# EAGLE board HX4002 CE021 MAX40200 Panel (EAGLE 9.6.2)
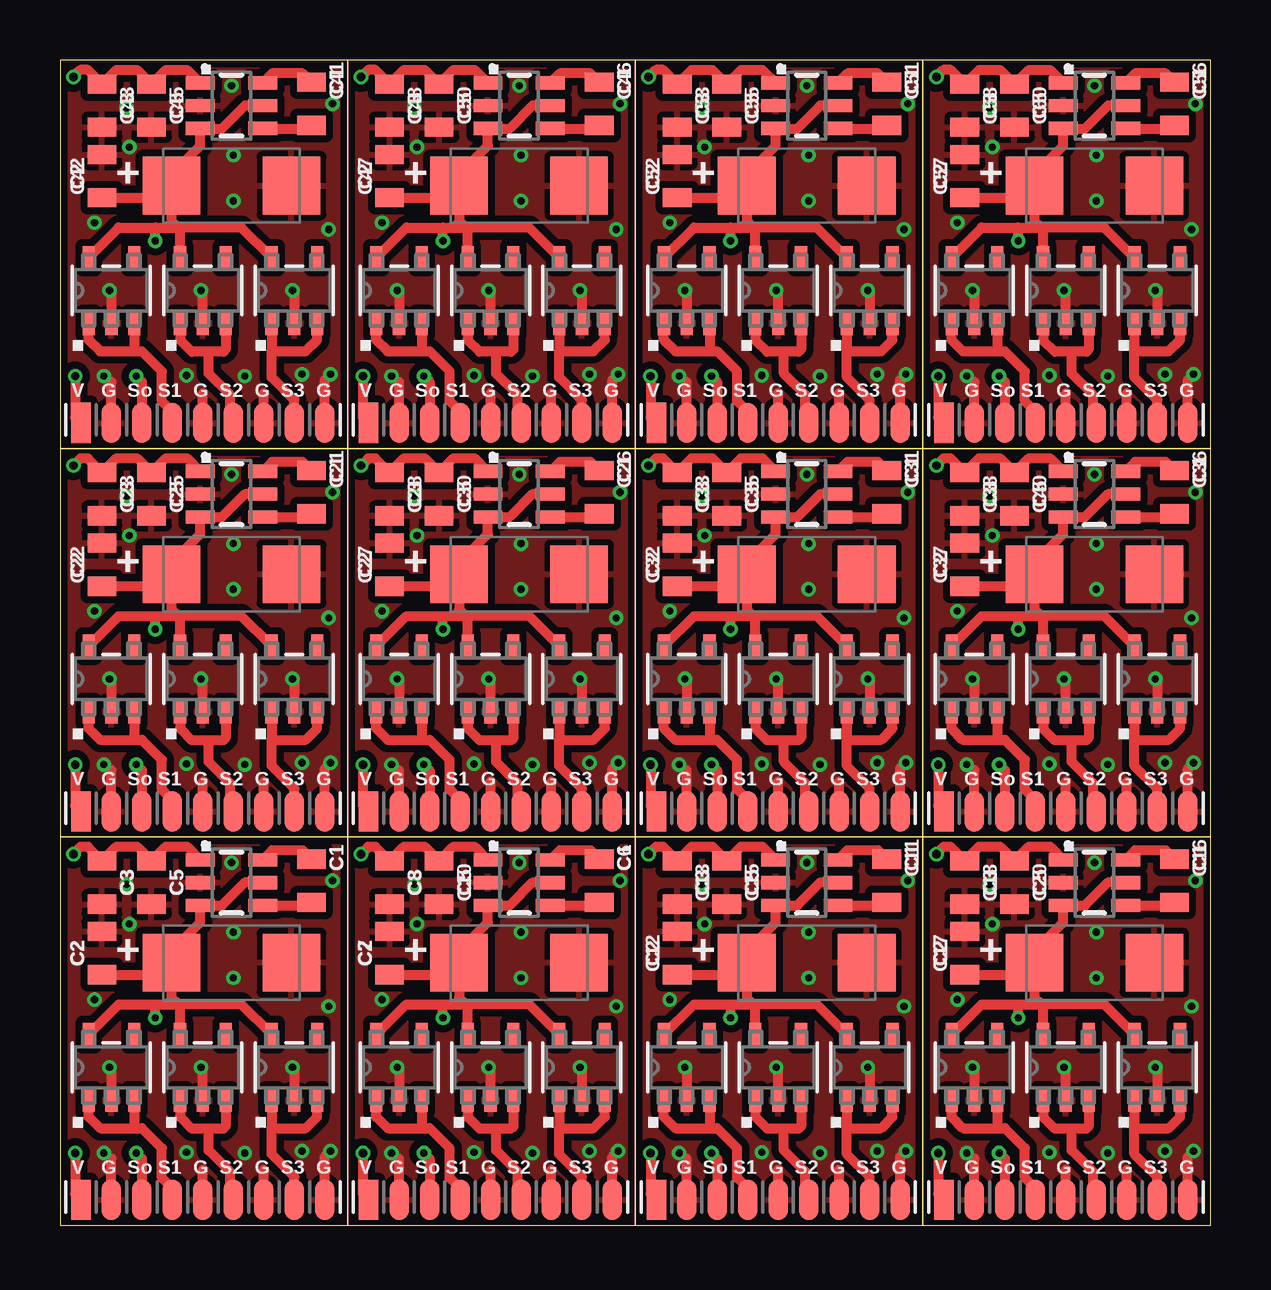
[diagram p0: board, top side]
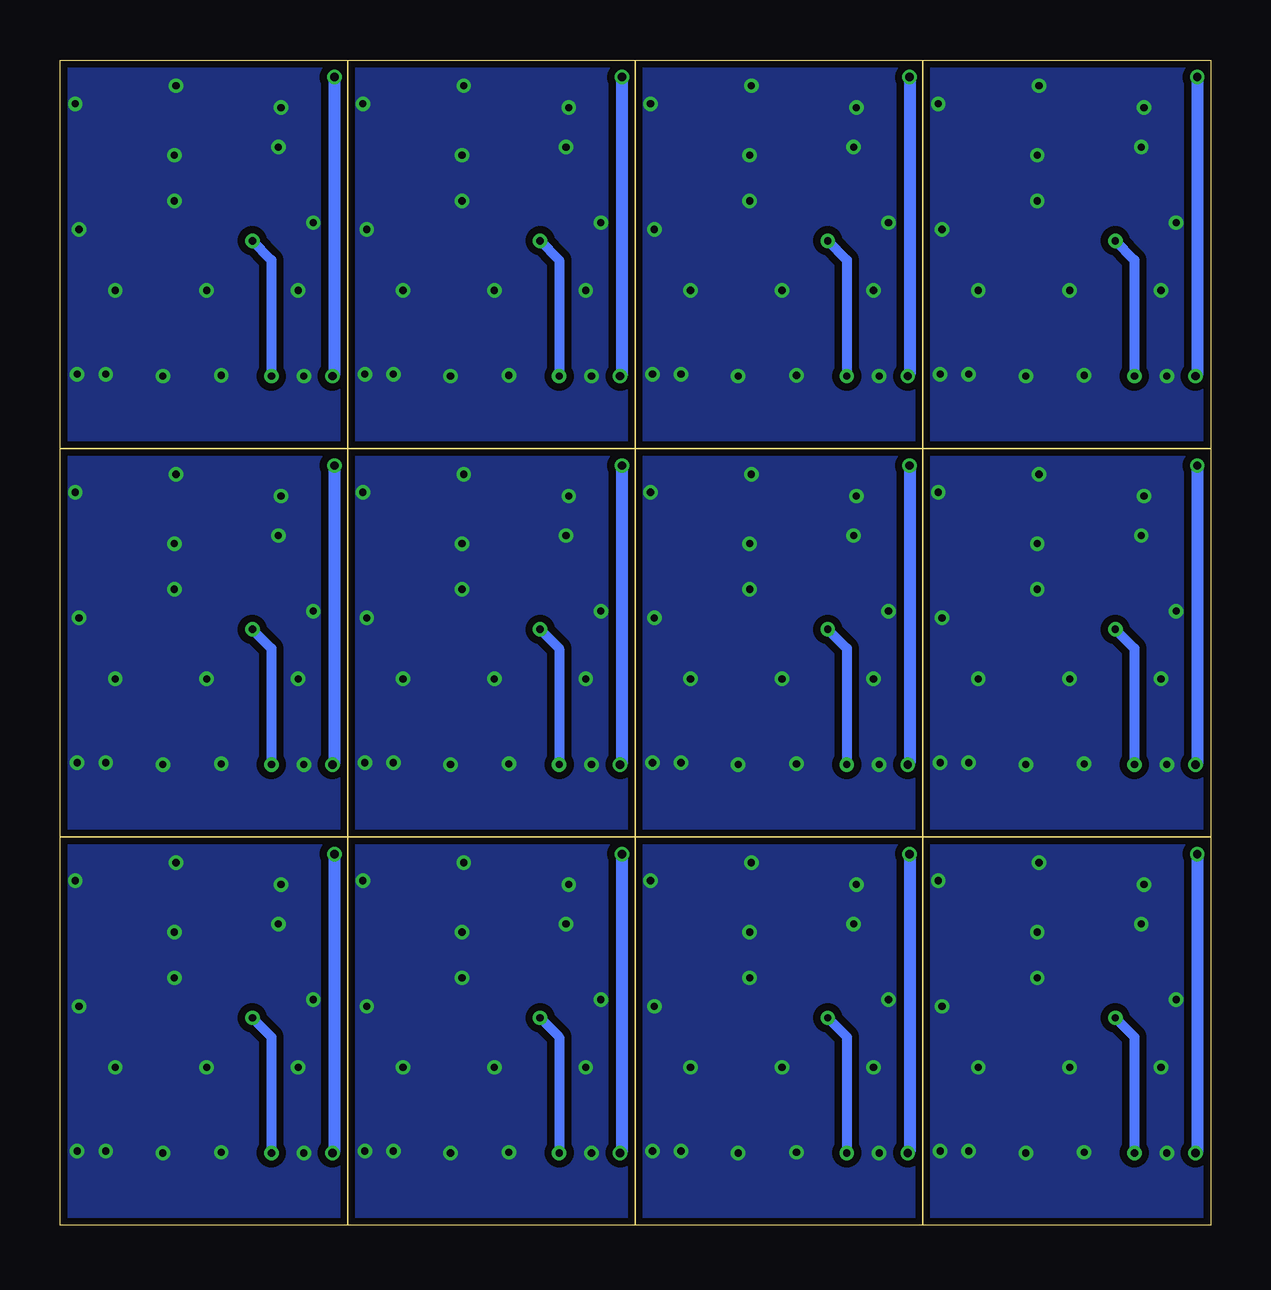
[diagram p1: board, bottom side, seen from below]

Size 47.94 x 48.58 mm. Coordinates in mm from the lower left corner, seen from the top.
Outline: 11.99,0 0,0 0,16.19
Outline: 11.99,0 11.99,16.19
Outline: 11.99,16.19 0,16.19
Outline: 11.99,0 23.97,0
Outline: 23.97,0 23.97,16.19
Outline: 23.97,16.19 11.99,16.19
Outline: 11.99,16.19 11.99,0
Outline: 23.97,0 35.96,0
Outline: 35.96,0 35.96,16.19
Outline: 35.96,16.19 23.97,16.19
Outline: 23.97,16.19 23.97,0
Outline: 35.96,0 47.94,0 47.94,16.19
Outline: 47.94,16.19 35.96,16.19
Outline: 35.96,16.19 35.96,0
Outline: 0,16.19 11.99,16.19
Outline: 11.99,16.19 11.99,32.38
Outline: 11.99,32.38 0,32.38
Outline: 0,32.38 0,16.19
Outline: 11.99,16.19 23.97,16.19
Outline: 23.97,16.19 23.97,32.38
Outline: 23.97,32.38 11.99,32.38
Outline: 11.99,32.38 11.99,16.19
Outline: 23.97,16.19 35.96,16.19
Outline: 35.96,16.19 35.96,32.38
Outline: 35.96,32.38 23.97,32.38
Outline: 23.97,32.38 23.97,16.19
Outline: 35.96,16.19 47.94,16.19
Outline: 47.94,16.19 47.94,32.38
Outline: 47.94,32.38 35.96,32.38
Outline: 35.96,32.38 35.96,16.19
Outline: 0,32.38 11.99,32.38
Outline: 11.99,32.38 11.99,48.58
Outline: 11.99,48.58 0,48.58 0,32.38
Outline: 11.99,32.38 23.97,32.38
Outline: 23.97,32.38 23.97,48.58
Outline: 23.97,48.58 11.99,48.58
Outline: 11.99,48.58 11.99,32.38
Outline: 23.97,32.38 35.96,32.38
Outline: 35.96,32.38 35.96,48.58
Outline: 35.96,48.58 23.97,48.58
Outline: 23.97,48.58 23.97,32.38
Outline: 35.96,32.38 47.94,32.38
Outline: 47.94,32.38 47.94,48.58 35.96,48.58
Outline: 35.96,48.58 35.96,32.38
Copper layers (1*16): Top 0.035559375mm / dielectric 1.6mm / Bottom 0.035559375mm
Design rules "Arxterra-HLCpcb-2-layer-KW": minimum track width 6mil, minimum drill 0.3mm, track to track 6mil, track to pad 6mil, pad to pad 6mil, via to via 10mil, smd to smd 6mil, copper to edge 8mil, drill to drill 6mil, minimum pad ring 5mil, minimum via ring 3mil, stop-mask expansion 2.5mil, vias tented up to drill 25mil, thermal gap 10mil

## Footprints (pad centres in the part's own frame; a part is rotated, then mirrored left to right if it is on the bottom)
0805 = smd 0.8 x 1.2: 1 -0.9,0; 2 0.9,0
SMC_C = smd 2.4 x 2.4: + -2.5,0; - 2.5,0
SOT23-6 = smd 0.55 x 1.2: 1 0.95,1.3; 2 0,1.3; 3 -0.95,1.3; 4 -0.95,-1.3; 5 0,-1.3; 6 0.95,-1.3
21-0057F_MXM = smd 0.978 x 0.508: 1 -1.365,0.95; 2 -1.365,0; 3 -1.365,-0.95; 4 1.365,-0.95; 5 1.365,0.95
M_1R09_50MIL-V = smd 0.813 x 1.676: P$1 -5.08,-0.127; P$2 -3.81,-0.127; P$3 -2.54,-0.127; P$4 -1.27,-0.127; P$5 0,-0.127; P$6 1.27,-0.127; P$7 2.54,-0.127; P$8 3.81,-0.127; P$9 5.08,-0.127

## Placement (x,y rotation side)
C1  4.7uF  [0805]  10.48,14.37 90 top
C2  10uF  [0805]  1.75,11.35 90 top
C3  10uF  [0805]  1.75,14.29 270 top
C4  330uF  [SMC_C]  7.14,10.95 0 top
C5  10uF  [0805]  3.81,14.29 270 top
C6  4.7uF  [0805]  22.46,14.37 90 top
C7  10uF  [0805]  13.73,11.35 90 top
C8  10uF  [0805]  13.73,14.29 270 top
C9  330uF  [SMC_C]  19.13,10.95 0 top
C10  10uF  [0805]  15.8,14.29 270 top
C11  4.7uF  [0805]  34.45,14.37 90 top
C12  10uF  [0805]  25.72,11.35 90 top
C13  10uF  [0805]  25.72,14.29 270 top
C14  330uF  [SMC_C]  31.11,10.95 0 top
C15  10uF  [0805]  27.78,14.29 270 top
C16  4.7uF  [0805]  46.43,14.37 90 top
C17  10uF  [0805]  37.7,11.35 90 top
C18  10uF  [0805]  37.7,14.29 270 top
C19  330uF  [SMC_C]  43.1,10.95 0 top
C20  10uF  [0805]  39.77,14.29 270 top
C21  4.7uF  [0805]  10.48,30.56 90 top
C22  10uF  [0805]  1.75,27.54 90 top
C23  10uF  [0805]  1.75,30.48 270 top
C24  330uF  [SMC_C]  7.14,27.15 0 top
C25  10uF  [0805]  3.81,30.48 270 top
C26  4.7uF  [0805]  22.46,30.56 90 top
C27  10uF  [0805]  13.73,27.54 90 top
C28  10uF  [0805]  13.73,30.48 270 top
C29  330uF  [SMC_C]  19.13,27.15 0 top
C30  10uF  [0805]  15.8,30.48 270 top
C31  4.7uF  [0805]  34.45,30.56 90 top
C32  10uF  [0805]  25.72,27.54 90 top
C33  10uF  [0805]  25.72,30.48 270 top
C34  330uF  [SMC_C]  31.11,27.15 0 top
C35  10uF  [0805]  27.78,30.48 270 top
C36  4.7uF  [0805]  46.43,30.56 90 top
C37  10uF  [0805]  37.7,27.54 90 top
C38  10uF  [0805]  37.7,30.48 270 top
C39  330uF  [SMC_C]  43.1,27.15 0 top
C40  10uF  [0805]  39.77,30.48 270 top
C41  4.7uF  [0805]  10.48,46.75 90 top
C42  10uF  [0805]  1.75,43.74 90 top
C43  10uF  [0805]  1.75,46.67 270 top
C44  330uF  [SMC_C]  7.14,43.34 0 top
C45  10uF  [0805]  3.81,46.67 270 top
C46  4.7uF  [0805]  22.46,46.75 90 top
C47  10uF  [0805]  13.73,43.74 90 top
C48  10uF  [0805]  13.73,46.67 270 top
C49  330uF  [SMC_C]  19.13,43.34 0 top
C50  10uF  [0805]  15.8,46.67 270 top
C51  4.7uF  [0805]  34.45,46.75 90 top
C52  10uF  [0805]  25.72,43.74 90 top
C53  10uF  [0805]  25.72,46.67 270 top
C54  330uF  [SMC_C]  31.11,43.34 0 top
C55  10uF  [0805]  27.78,46.67 270 top
C56  4.7uF  [0805]  46.43,46.75 90 top
C57  10uF  [0805]  37.7,43.74 90 top
C58  10uF  [0805]  37.7,46.67 270 top
C59  330uF  [SMC_C]  43.1,43.34 0 top
C60  10uF  [0805]  39.77,46.67 270 top
U1  HX4002  [SOT23-6]  7.14,14.29 90 top
U2  MAX40200AUK+  [21-0057F_MXM]  2.14,6.59 90 top
U3  MAX40200AUK+  [21-0057F_MXM]  5.95,6.59 90 top
U4  MAX40200AUK+  [21-0057F_MXM]  9.76,6.59 90 top
U5  HX4002  [SOT23-6]  19.13,14.29 90 top
U6  MAX40200AUK+  [21-0057F_MXM]  14.13,6.59 90 top
U7  MAX40200AUK+  [21-0057F_MXM]  17.94,6.59 90 top
U8  MAX40200AUK+  [21-0057F_MXM]  21.75,6.59 90 top
U9  HX4002  [SOT23-6]  31.11,14.29 90 top
U10  MAX40200AUK+  [21-0057F_MXM]  26.11,6.59 90 top
U11  MAX40200AUK+  [21-0057F_MXM]  29.92,6.59 90 top
U12  MAX40200AUK+  [21-0057F_MXM]  33.73,6.59 90 top
U13  HX4002  [SOT23-6]  43.1,14.29 90 top
U14  MAX40200AUK+  [21-0057F_MXM]  38.1,6.59 90 top
U15  MAX40200AUK+  [21-0057F_MXM]  41.91,6.59 90 top
U16  MAX40200AUK+  [21-0057F_MXM]  45.72,6.59 90 top
U17  HX4002  [SOT23-6]  7.14,30.48 90 top
U18  MAX40200AUK+  [21-0057F_MXM]  2.14,22.78 90 top
U19  MAX40200AUK+  [21-0057F_MXM]  5.95,22.78 90 top
U20  MAX40200AUK+  [21-0057F_MXM]  9.76,22.78 90 top
U21  HX4002  [SOT23-6]  19.13,30.48 90 top
U22  MAX40200AUK+  [21-0057F_MXM]  14.13,22.78 90 top
U23  MAX40200AUK+  [21-0057F_MXM]  17.94,22.78 90 top
U24  MAX40200AUK+  [21-0057F_MXM]  21.75,22.78 90 top
U25  HX4002  [SOT23-6]  31.11,30.48 90 top
U26  MAX40200AUK+  [21-0057F_MXM]  26.11,22.78 90 top
U27  MAX40200AUK+  [21-0057F_MXM]  29.92,22.78 90 top
U28  MAX40200AUK+  [21-0057F_MXM]  33.73,22.78 90 top
U29  HX4002  [SOT23-6]  43.1,30.48 90 top
U30  MAX40200AUK+  [21-0057F_MXM]  38.1,22.78 90 top
U31  MAX40200AUK+  [21-0057F_MXM]  41.91,22.78 90 top
U32  MAX40200AUK+  [21-0057F_MXM]  45.72,22.78 90 top
U33  HX4002  [SOT23-6]  7.14,46.67 90 top
U34  MAX40200AUK+  [21-0057F_MXM]  2.14,38.97 90 top
U35  MAX40200AUK+  [21-0057F_MXM]  5.95,38.97 90 top
U36  MAX40200AUK+  [21-0057F_MXM]  9.76,38.97 90 top
U37  HX4002  [SOT23-6]  19.13,46.67 90 top
U38  MAX40200AUK+  [21-0057F_MXM]  14.13,38.97 90 top
U39  MAX40200AUK+  [21-0057F_MXM]  17.94,38.97 90 top
U40  MAX40200AUK+  [21-0057F_MXM]  21.75,38.97 90 top
U41  HX4002  [SOT23-6]  31.11,46.67 90 top
U42  MAX40200AUK+  [21-0057F_MXM]  26.11,38.97 90 top
U43  MAX40200AUK+  [21-0057F_MXM]  29.92,38.97 90 top
U44  MAX40200AUK+  [21-0057F_MXM]  33.73,38.97 90 top
U45  HX4002  [SOT23-6]  43.1,46.67 90 top
U46  MAX40200AUK+  [21-0057F_MXM]  38.1,38.97 90 top
U47  MAX40200AUK+  [21-0057F_MXM]  41.91,38.97 90 top
U48  MAX40200AUK+  [21-0057F_MXM]  45.72,38.97 90 top
X1  [M_1R09_50MIL-V]  17.94,1.19 0 top
X2  [M_1R09_50MIL-V]  5.95,1.19 0 top
X3  [M_1R09_50MIL-V]  29.92,1.19 0 top
X4  [M_1R09_50MIL-V]  41.91,1.19 0 top
X5  [M_1R09_50MIL-V]  5.95,17.38 0 top
X6  [M_1R09_50MIL-V]  17.94,17.38 0 top
X7  [M_1R09_50MIL-V]  29.92,17.38 0 top
X8  [M_1R09_50MIL-V]  41.91,17.38 0 top
X9  [M_1R09_50MIL-V]  5.95,33.58 0 top
X10  [M_1R09_50MIL-V]  17.94,33.58 0 top
X11  [M_1R09_50MIL-V]  29.92,33.58 0 top
X12  [M_1R09_50MIL-V]  41.91,33.58 0 top

## Library data of the parts
C1-C3 C5-C8 C10-C13 C15-C18 C20-C23 C25-C28 C30-C33 C35-C38 C40-C43 C45-C48 C50-C53 C55-C58 C60 = SparkFun-Capacitors
C4 C9 C14 C19 C24 C29 C34 C39 C44 C49 C54 C59 = rcl; SPICEPREFIX: C
U1 U5 U9 U13 U17 U21 U25 U29 U33 U37 U41 U45 = CE021-KW
U2-U4 U6-U8 U10-U12 U14-U16 U18-U20 U22-U24 U26-U28 U30-U32 U34-U36 U38-U40 U42-U44 U46-U48 = MAX40200AUK; BUILT_BY: EMA_UL_Team; COPYRIGHT: Copyright (C) 2018 Accelerated Designs. All rights reserved; MANUFACTURER_PART_NUMBER: MAX40200AUK+; SOURCELIBRARY: Maxim_2018-11-30; VENDOR: Maxim Integrated Products
X1-X12 = con pinheader male

## Nets
GND: C2.2 C3.2 C4.- C5.2 U1.2 U2.2 U3.2 U4.2 X2.P$2 X2.P$5 X2.P$7 X2.P$9
GND1: C7.2 C8.2 C9.- C10.2 U5.2 U6.2 U7.2 U8.2 X1.P$2 X1.P$5 X1.P$7 X1.P$9
GND2: C12.2 C13.2 C14.- C15.2 U9.2 U10.2 U11.2 U12.2 X3.P$2 X3.P$5 X3.P$7 X3.P$9
GND3: C17.2 C18.2 C19.- C20.2 U13.2 U14.2 U15.2 U16.2 X4.P$2 X4.P$5 X4.P$7 X4.P$9
GND4: C22.2 C23.2 C24.- C25.2 U17.2 U18.2 U19.2 U20.2 X5.P$2 X5.P$5 X5.P$7 X5.P$9
GND5: C27.2 C28.2 C29.- C30.2 U21.2 U22.2 U23.2 U24.2 X6.P$2 X6.P$5 X6.P$7 X6.P$9
GND6: C32.2 C33.2 C34.- C35.2 U25.2 U26.2 U27.2 U28.2 X7.P$2 X7.P$5 X7.P$7 X7.P$9
GND7: C37.2 C38.2 C39.- C40.2 U29.2 U30.2 U31.2 U32.2 X8.P$2 X8.P$5 X8.P$7 X8.P$9
GND8: C42.2 C43.2 C44.- C45.2 U33.2 U34.2 U35.2 U36.2 X9.P$2 X9.P$5 X9.P$7 X9.P$9
GND9: C47.2 C48.2 C49.- C50.2 U37.2 U38.2 U39.2 U40.2 X10.P$2 X10.P$5 X10.P$7 X10.P$9
GND10: C52.2 C53.2 C54.- C55.2 U41.2 U42.2 U43.2 U44.2 X11.P$2 X11.P$5 X11.P$7 X11.P$9
GND11: C57.2 C58.2 C59.- C60.2 U45.2 U46.2 U47.2 U48.2 X12.P$2 X12.P$5 X12.P$7 X12.P$9
IN1: U2.1 U2.3 X2.P$4
IN2: U3.1 U3.3 X2.P$6
IN3: U4.1 U4.3 X2.P$8
IN4: U6.1 U6.3 X1.P$4
IN5: U7.1 U7.3 X1.P$6
IN6: U8.1 U8.3 X1.P$8
IN7: U10.1 U10.3 X3.P$4
IN8: U11.1 U11.3 X3.P$6
IN9: U12.1 U12.3 X3.P$8
IN10: U14.1 U14.3 X4.P$4
IN11: U15.1 U15.3 X4.P$6
IN12: U16.1 U16.3 X4.P$8
IN13: U18.1 U18.3 X5.P$4
IN14: U19.1 U19.3 X5.P$6
IN15: U20.1 U20.3 X5.P$8
IN16: U22.1 U22.3 X6.P$4
IN17: U23.1 U23.3 X6.P$6
IN18: U24.1 U24.3 X6.P$8
IN19: U26.1 U26.3 X7.P$4
IN20: U27.1 U27.3 X7.P$6
IN21: U28.1 U28.3 X7.P$8
IN22: U30.1 U30.3 X8.P$4
IN23: U31.1 U31.3 X8.P$6
IN24: U32.1 U32.3 X8.P$8
IN25: U34.1 U34.3 X9.P$4
IN26: U35.1 U35.3 X9.P$6
IN27: U36.1 U36.3 X9.P$8
IN28: U38.1 U38.3 X10.P$4
IN29: U39.1 U39.3 X10.P$6
IN30: U40.1 U40.3 X10.P$8
IN31: U42.1 U42.3 X11.P$4
IN32: U43.1 U43.3 X11.P$6
IN33: U44.1 U44.3 X11.P$8
IN34: U46.1 U46.3 X12.P$4
IN35: U47.1 U47.3 X12.P$6
IN36: U48.1 U48.3 X12.P$8
N$1: C1.1 U1.4
N$2: C6.1 U5.4
N$3: C1.2 U1.6
N$4: C6.2 U5.6
N$5: C11.1 U9.4
N$6: C11.2 U9.6
N$7: C16.1 U13.4
N$8: C16.2 U13.6
N$9: C21.1 U17.4
N$10: C21.2 U17.6
N$11: C26.1 U21.4
N$12: C26.2 U21.6
N$13: C31.1 U25.4
N$14: C31.2 U25.6
N$15: C36.1 U29.4
N$16: C36.2 U29.6
N$17: C41.1 U33.4
N$18: C41.2 U33.6
N$19: C46.1 U37.4
N$20: C46.2 U37.6
N$21: C51.1 U41.4
N$22: C51.2 U41.6
N$23: C56.1 U45.4
N$24: C56.2 U45.6
SOLAR: C2.1 C4.+ U1.3 U1.5 U2.5 U3.5 U4.5 X2.P$3
SOLAR1: C7.1 C9.+ U5.3 U5.5 U6.5 U7.5 U8.5 X1.P$3
SOLAR2: C12.1 C14.+ U9.3 U9.5 U10.5 U11.5 U12.5 X3.P$3
SOLAR3: C17.1 C19.+ U13.3 U13.5 U14.5 U15.5 U16.5 X4.P$3
SOLAR4: C22.1 C24.+ U17.3 U17.5 U18.5 U19.5 U20.5 X5.P$3
SOLAR5: C27.1 C29.+ U21.3 U21.5 U22.5 U23.5 U24.5 X6.P$3
SOLAR6: C32.1 C34.+ U25.3 U25.5 U26.5 U27.5 U28.5 X7.P$3
SOLAR7: C37.1 C39.+ U29.3 U29.5 U30.5 U31.5 U32.5 X8.P$3
SOLAR8: C42.1 C44.+ U33.3 U33.5 U34.5 U35.5 U36.5 X9.P$3
SOLAR9: C47.1 C49.+ U37.3 U37.5 U38.5 U39.5 U40.5 X10.P$3
SOLAR10: C52.1 C54.+ U41.3 U41.5 U42.5 U43.5 U44.5 X11.P$3
SOLAR11: C57.1 C59.+ U45.3 U45.5 U46.5 U47.5 U48.5 X12.P$3
VOUT: C3.1 C5.1 U1.1 X2.P$1
VOUT1: C8.1 C10.1 U5.1 X1.P$1
VOUT2: C13.1 C15.1 U9.1 X3.P$1
VOUT3: C18.1 C20.1 U13.1 X4.P$1
VOUT4: C23.1 C25.1 U17.1 X5.P$1
VOUT5: C28.1 C30.1 U21.1 X6.P$1
VOUT6: C33.1 C35.1 U25.1 X7.P$1
VOUT7: C38.1 C40.1 U29.1 X8.P$1
VOUT8: C43.1 C45.1 U33.1 X9.P$1
VOUT9: C48.1 C50.1 U37.1 X10.P$1
VOUT10: C53.1 C55.1 U41.1 X11.P$1
VOUT11: C58.1 C60.1 U45.1 X12.P$1

## Tracks (layer width: path | path; a pad name or v marks a point on that pad's centre or on a via)
GND  (via drill 0.3 pad 0.6)
  Top 0.406: U3.2 5.95,6.51 | U2.2 2.14,6.51 v2.06,6.59 | U4.2 9.76,6.51 v9.68,6.59 | X2.P$2 2.14,2.78 | X2.P$5 5.95,2.3 | X2.P$7 8.49,2.3 | X2.P$9 11.03,2.86 v11.27,3.1
  other vias: 5.87,6.59 7.15,15.12 1.83,3.02 7.7,3.02 10.08,3.1 5.27,3.04 1.43,9.41 11.19,9.13 2.89,12.56 7.22,10.32 11.35,14.37 7.22,12.22 2.77,14.21
  pour Top (isolate 0.305): 0,0 0,16.19 11.99,16.19 11.99,0
  pour Bottom (isolate 0.305): 0,0 0,16.19 11.99,16.19 11.99,0
GND1  (via drill 0.3 pad 0.6)
  Top 0.406: U7.2 17.94,6.51 | U6.2 14.13,6.51 v14.05,6.59 | U8.2 21.75,6.51 v21.67,6.59 | X1.P$2 14.13,2.78 | X1.P$5 17.94,2.3 | X1.P$7 20.48,2.3 | X1.P$9 23.02,2.86 v23.26,3.1
  other vias: 17.86,6.59 19.13,15.12 13.81,3.02 19.68,3.02 22.07,3.1 17.25,3.04 13.42,9.41 23.18,9.13 14.87,12.56 19.21,10.32 23.34,14.37 19.21,12.22 14.76,14.21
  pour Top (isolate 0.305): 11.99,0 11.99,16.19 23.97,16.19 23.97,0
  pour Bottom (isolate 0.305): 11.99,0 11.99,16.19 23.97,16.19 23.97,0
GND2  (via drill 0.3 pad 0.6)
  Top 0.406: U11.2 29.92,6.51 | U10.2 26.11,6.51 v26.04,6.59 | U12.2 33.73,6.51 v33.66,6.59 | X3.P$2 26.11,2.78 | X3.P$5 29.92,2.3 | X3.P$7 32.46,2.3 | X3.P$9 35,2.86 v35.24,3.1
  other vias: 29.84,6.59 31.12,15.12 25.8,3.02 31.67,3.02 34.05,3.1 29.24,3.04 25.41,9.41 35.16,9.13 26.86,12.56 31.19,10.32 35.32,14.37 31.19,12.22 26.75,14.21
  pour Top (isolate 0.305): 23.97,0 23.97,16.19 35.96,16.19 35.96,0
  pour Bottom (isolate 0.305): 23.97,0 23.97,16.19 35.96,16.19 35.96,0
GND3  (via drill 0.3 pad 0.6)
  Top 0.406: U15.2 41.91,6.51 | U14.2 38.1,6.51 v38.02,6.59 | U16.2 45.72,6.51 v45.64,6.59 | X4.P$2 38.1,2.78 | X4.P$5 41.91,2.3 | X4.P$7 44.45,2.3 | X4.P$9 46.99,2.86 v47.23,3.1
  other vias: 41.83,6.59 43.11,15.12 37.78,3.02 43.66,3.02 46.04,3.1 41.22,3.04 37.39,9.41 47.15,9.13 38.85,12.56 43.18,10.32 47.31,14.37 43.18,12.22 38.73,14.21
  pour Top (isolate 0.305): 35.96,0 35.96,16.19 47.94,16.19 47.94,0
  pour Bottom (isolate 0.305): 35.96,0 35.96,16.19 47.94,16.19 47.94,0
GND4  (via drill 0.3 pad 0.6)
  Top 0.406: U19.2 5.95,22.7 | U18.2 2.14,22.7 v2.06,22.78 | U20.2 9.76,22.7 v9.68,22.78 | X5.P$2 2.14,18.97 | X5.P$5 5.95,18.49 | X5.P$7 8.49,18.49 | X5.P$9 11.03,19.05 v11.27,19.29
  other vias: 5.87,22.78 7.15,31.31 1.83,19.21 7.7,19.21 10.08,19.29 5.27,19.24 1.43,25.6 11.19,25.32 2.89,28.75 7.22,26.51 11.35,30.56 7.22,28.42 2.77,30.4
  pour Top (isolate 0.305): 0,16.19 0,32.38 11.99,32.38 11.99,16.19
  pour Bottom (isolate 0.305): 0,16.19 0,32.38 11.99,32.38 11.99,16.19
GND5  (via drill 0.3 pad 0.6)
  Top 0.406: U23.2 17.94,22.7 | U22.2 14.13,22.7 v14.05,22.78 | U24.2 21.75,22.7 v21.67,22.78 | X6.P$2 14.13,18.97 | X6.P$5 17.94,18.49 | X6.P$7 20.48,18.49 | X6.P$9 23.02,19.05 v23.26,19.29
  other vias: 17.86,22.78 19.13,31.31 13.81,19.21 19.68,19.21 22.07,19.29 17.25,19.24 13.42,25.6 23.18,25.32 14.87,28.75 19.21,26.51 23.34,30.56 19.21,28.42 14.76,30.4
  pour Top (isolate 0.305): 11.99,16.19 11.99,32.38 23.97,32.38 23.97,16.19
  pour Bottom (isolate 0.305): 11.99,16.19 11.99,32.38 23.97,32.38 23.97,16.19
GND6  (via drill 0.3 pad 0.6)
  Top 0.406: U27.2 29.92,22.7 | U26.2 26.11,22.7 v26.04,22.78 | U28.2 33.73,22.7 v33.66,22.78 | X7.P$2 26.11,18.97 | X7.P$5 29.92,18.49 | X7.P$7 32.46,18.49 | X7.P$9 35,19.05 v35.24,19.29
  other vias: 29.84,22.78 31.12,31.31 25.8,19.21 31.67,19.21 34.05,19.29 29.24,19.24 25.41,25.6 35.16,25.32 26.86,28.75 31.19,26.51 35.32,30.56 31.19,28.42 26.75,30.4
  pour Top (isolate 0.305): 23.97,16.19 23.97,32.38 35.96,32.38 35.96,16.19
  pour Bottom (isolate 0.305): 23.97,16.19 23.97,32.38 35.96,32.38 35.96,16.19
GND7  (via drill 0.3 pad 0.6)
  Top 0.406: U31.2 41.91,22.7 | U30.2 38.1,22.7 v38.02,22.78 | U32.2 45.72,22.7 v45.64,22.78 | X8.P$2 38.1,18.97 | X8.P$5 41.91,18.49 | X8.P$7 44.45,18.49 | X8.P$9 46.99,19.05 v47.23,19.29
  other vias: 41.83,22.78 43.11,31.31 37.78,19.21 43.66,19.21 46.04,19.29 41.22,19.24 37.39,25.6 47.15,25.32 38.85,28.75 43.18,26.51 47.31,30.56 43.18,28.42 38.73,30.4
  pour Top (isolate 0.305): 35.96,16.19 35.96,32.38 47.94,32.38 47.94,16.19
  pour Bottom (isolate 0.305): 35.96,16.19 35.96,32.38 47.94,32.38 47.94,16.19
GND8  (via drill 0.3 pad 0.6)
  Top 0.406: U35.2 5.95,38.89 | U34.2 2.14,38.89 v2.06,38.97 | U36.2 9.76,38.89 v9.68,38.97 | X9.P$2 2.14,35.16 | X9.P$5 5.95,34.69 | X9.P$7 8.49,34.69 | X9.P$9 11.03,35.24 v11.27,35.48
  other vias: 5.87,38.97 7.15,47.5 1.83,35.4 7.7,35.4 10.08,35.48 5.27,35.43 1.43,41.8 11.19,41.51 2.89,44.95 7.22,42.7 11.35,46.75 7.22,44.61 2.77,46.59
  pour Top (isolate 0.305): 0,32.38 0,48.58 11.99,48.58 11.99,32.38
  pour Bottom (isolate 0.305): 0,32.38 0,48.58 11.99,48.58 11.99,32.38
GND9  (via drill 0.3 pad 0.6)
  Top 0.406: U39.2 17.94,38.89 | U38.2 14.13,38.89 v14.05,38.97 | U40.2 21.75,38.89 v21.67,38.97 | X10.P$2 14.13,35.16 | X10.P$5 17.94,34.69 | X10.P$7 20.48,34.69 | X10.P$9 23.02,35.24 v23.26,35.48
  other vias: 17.86,38.97 19.13,47.5 13.81,35.4 19.68,35.4 22.07,35.48 17.25,35.43 13.42,41.8 23.18,41.51 14.87,44.95 19.21,42.7 23.34,46.75 19.21,44.61 14.76,46.59
  pour Top (isolate 0.305): 11.99,32.38 11.99,48.58 23.97,48.58 23.97,32.38
  pour Bottom (isolate 0.305): 11.99,32.38 11.99,48.58 23.97,48.58 23.97,32.38
GND10  (via drill 0.3 pad 0.6)
  Top 0.406: U43.2 29.92,38.89 | U42.2 26.11,38.89 v26.04,38.97 | U44.2 33.73,38.89 v33.66,38.97 | X11.P$2 26.11,35.16 | X11.P$5 29.92,34.69 | X11.P$7 32.46,34.69 | X11.P$9 35,35.24 v35.24,35.48
  other vias: 29.84,38.97 31.12,47.5 25.8,35.4 31.67,35.4 34.05,35.48 29.24,35.43 25.41,41.8 35.16,41.51 26.86,44.95 31.19,42.7 35.32,46.75 31.19,44.61 26.75,46.59
  pour Top (isolate 0.305): 23.97,32.38 23.97,48.58 35.96,48.58 35.96,32.38
  pour Bottom (isolate 0.305): 23.97,32.38 23.97,48.58 35.96,48.58 35.96,32.38
GND11  (via drill 0.3 pad 0.6)
  Top 0.406: U47.2 41.91,38.89 | U46.2 38.1,38.89 v38.02,38.97 | U48.2 45.72,38.89 v45.64,38.97 | X12.P$2 38.1,35.16 | X12.P$5 41.91,34.69 | X12.P$7 44.45,34.69 | X12.P$9 46.99,35.24 v47.23,35.48
  other vias: 41.83,38.97 43.11,47.5 37.78,35.4 43.66,35.4 46.04,35.48 41.22,35.43 37.39,41.8 47.15,41.51 38.85,44.95 43.18,42.7 47.31,46.75 43.18,44.61 38.73,46.59
  pour Top (isolate 0.305): 35.96,32.38 35.96,48.58 47.94,48.58 47.94,32.38
  pour Bottom (isolate 0.305): 35.96,32.38 35.96,48.58 47.94,48.58 47.94,32.38
IN1
  Top 0.406: U2.3 3.09,4.05 3.1,4.05 | X2.P$4 4.68,1.54 4.25,1.98 4.25,3.21 3.41,4.05 3.1,4.05 | U2.1 1.19,4.52 1.67,4.05 3.1,4.05
IN2
  Top 0.406: U3.1 5,4.53 5,4.52 5.5,4.03 6.19,4.03 | U3.3 6.91,4.13 6.81,4.03 6.19,4.03 | X2.P$6 7.06,1.22 7.06,2.26 6.19,3.13 6.19,4.03
IN3
  Top 0.406: U4.1 8.81,4.05 | U4.3 10.72,4.52 10.24,4.05 8.81,4.05 | X2.P$8 9.76,2.02 8.81,2.97 8.81,4.05
IN4
  Top 0.406: U6.3 15.08,4.05 | X1.P$4 16.67,1.54 16.23,1.98 16.23,3.21 15.4,4.05 15.08,4.05 | U6.1 13.18,4.52 13.65,4.05 15.08,4.05
IN5
  Top 0.406: U7.1 16.99,4.53 16.99,4.52 17.48,4.03 18.18,4.03 | U7.3 18.89,4.13 18.79,4.03 18.18,4.03 | X1.P$6 19.05,1.22 19.05,2.26 18.18,3.13 18.18,4.03
IN6
  Top 0.406: U8.1 20.8,4.05 | U8.3 22.7,4.52 22.23,4.05 20.8,4.05 | X1.P$8 21.75,2.02 20.8,2.97 20.8,4.05
IN7
  Top 0.406: U10.3 27.06,4.05 27.07,4.05 | X3.P$4 28.65,1.54 28.22,1.98 28.22,3.21 27.38,4.05 27.07,4.05 | U10.1 25.16,4.52 25.64,4.05 27.07,4.05
IN8
  Top 0.406: U11.1 28.97,4.53 28.97,4.52 29.47,4.03 30.16,4.03 | U11.3 30.88,4.13 30.78,4.03 30.16,4.03 | X3.P$6 31.04,1.22 31.04,2.26 30.16,3.13 30.16,4.03
IN9
  Top 0.406: U12.1 32.78,4.05 | U12.3 34.69,4.52 34.21,4.05 32.78,4.05 | X3.P$8 33.73,2.02 32.78,2.97 32.78,4.05
IN10
  Top 0.406: U14.3 39.05,4.05 | X4.P$4 40.64,1.54 40.2,1.98 40.2,3.21 39.37,4.05 39.05,4.05 | U14.1 37.15,4.52 37.62,4.05 39.05,4.05
IN11
  Top 0.406: U15.1 40.96,4.53 40.96,4.52 41.45,4.03 42.15,4.03 | U15.3 42.86,4.13 42.77,4.03 42.15,4.03 | X4.P$6 43.02,1.22 43.02,2.26 42.15,3.13 42.15,4.03
IN12
  Top 0.406: U16.1 44.77,4.05 | U16.3 46.67,4.52 46.2,4.05 44.77,4.05 | X4.P$8 45.72,2.02 44.77,2.97 44.77,4.05
IN13
  Top 0.406: U18.3 3.09,20.24 3.1,20.24 | X5.P$4 4.68,17.73 4.25,18.17 4.25,19.41 3.41,20.24 3.1,20.24 | U18.1 1.19,20.72 1.67,20.24 3.1,20.24
IN14
  Top 0.406: U19.1 5,20.72 5.5,20.22 6.19,20.22 | U19.3 6.91,20.32 6.81,20.22 6.19,20.22 | X5.P$6 7.06,17.41 7.06,18.45 6.19,19.32 6.19,20.22
IN15
  Top 0.406: U20.1 8.81,20.24 | U20.3 10.72,20.72 10.24,20.24 8.81,20.24 | X5.P$8 9.76,18.21 8.81,19.16 8.81,20.24
IN16
  Top 0.406: U22.3 15.08,20.24 | X6.P$4 16.67,17.73 16.23,18.17 16.23,19.41 15.4,20.24 15.08,20.24 | U22.1 13.18,20.72 13.65,20.24 15.08,20.24
IN17
  Top 0.406: U23.1 16.99,20.72 17.48,20.22 18.18,20.22 | U23.3 18.89,20.32 18.79,20.22 18.18,20.22 | X6.P$6 19.05,17.41 19.05,18.45 18.18,19.32 18.18,20.22
IN18
  Top 0.406: U24.1 20.8,20.24 | U24.3 22.7,20.72 22.23,20.24 20.8,20.24 | X6.P$8 21.75,18.21 20.8,19.16 20.8,20.24
IN19
  Top 0.406: U26.3 27.06,20.24 27.07,20.24 | X7.P$4 28.65,17.73 28.22,18.17 28.22,19.41 27.38,20.24 27.07,20.24 | U26.1 25.16,20.72 25.64,20.24 27.07,20.24
IN20
  Top 0.406: U27.1 28.97,20.72 29.47,20.22 30.16,20.22 | U27.3 30.88,20.32 30.78,20.22 30.16,20.22 | X7.P$6 31.04,17.41 31.04,18.45 30.16,19.32 30.16,20.22
IN21
  Top 0.406: U28.1 32.78,20.24 | U28.3 34.69,20.72 34.21,20.24 32.78,20.24 | X7.P$8 33.73,18.21 32.78,19.16 32.78,20.24
IN22
  Top 0.406: U30.3 39.05,20.24 | X8.P$4 40.64,17.73 40.2,18.17 40.2,19.41 39.37,20.24 39.05,20.24 | U30.1 37.15,20.72 37.62,20.24 39.05,20.24
IN23
  Top 0.406: U31.1 40.96,20.72 41.45,20.22 42.15,20.22 | U31.3 42.86,20.32 42.77,20.22 42.15,20.22 | X8.P$6 43.02,17.41 43.02,18.45 42.15,19.32 42.15,20.22
IN24
  Top 0.406: U32.1 44.77,20.24 | U32.3 46.67,20.72 46.2,20.24 44.77,20.24 | X8.P$8 45.72,18.21 44.77,19.16 44.77,20.24
IN25
  Top 0.406: U34.3 3.09,36.44 3.1,36.43 | X9.P$4 4.68,33.92 4.25,34.36 4.25,35.6 3.41,36.43 3.1,36.43 | U34.1 1.19,36.91 1.67,36.43 3.1,36.43
IN26
  Top 0.406: U35.1 5,36.91 5.5,36.41 6.19,36.41 | U35.3 6.91,36.51 6.81,36.41 6.19,36.41 | X9.P$6 7.06,33.61 7.06,34.64 6.19,35.51 6.19,36.41
IN27
  Top 0.406: U36.1 8.81,36.43 | U36.3 10.72,36.91 10.24,36.43 8.81,36.43 | X9.P$8 9.76,34.4 8.81,35.35 8.81,36.43
IN28
  Top 0.406: U38.3 15.08,36.44 15.08,36.43 | X10.P$4 16.67,33.92 16.23,34.36 16.23,35.6 15.4,36.43 15.08,36.43 | U38.1 13.18,36.91 13.65,36.43 15.08,36.43
IN29
  Top 0.406: U39.1 16.99,36.91 17.48,36.41 18.18,36.41 | U39.3 18.89,36.51 18.79,36.41 18.18,36.41 | X10.P$6 19.05,33.61 19.05,34.64 18.18,35.51 18.18,36.41
IN30
  Top 0.406: U40.1 20.8,36.43 | U40.3 22.7,36.91 22.23,36.43 20.8,36.43 | X10.P$8 21.75,34.4 20.8,35.35 20.8,36.43
IN31
  Top 0.406: U42.3 27.06,36.44 27.07,36.43 | X11.P$4 28.65,33.92 28.22,34.36 28.22,35.6 27.38,36.43 27.07,36.43 | U42.1 25.16,36.91 25.64,36.43 27.07,36.43
IN32
  Top 0.406: U43.1 28.97,36.91 29.47,36.41 30.16,36.41 | U43.3 30.88,36.51 30.78,36.41 30.16,36.41 | X11.P$6 31.04,33.61 31.04,34.64 30.16,35.51 30.16,36.41
IN33
  Top 0.406: U44.1 32.78,36.43 | U44.3 34.69,36.91 34.21,36.43 32.78,36.43 | X11.P$8 33.73,34.4 32.78,35.35 32.78,36.43
IN34
  Top 0.406: U46.3 39.05,36.44 39.05,36.43 | X12.P$4 40.64,33.92 40.2,34.36 40.2,35.6 39.37,36.43 39.05,36.43 | U46.1 37.15,36.91 37.62,36.43 39.05,36.43
IN35
  Top 0.406: U47.1 40.96,36.91 41.45,36.41 42.15,36.41 | U47.3 42.86,36.51 42.77,36.41 42.15,36.41 | X12.P$6 43.02,33.61 43.02,34.64 42.15,35.51 42.15,36.41
IN36
  Top 0.406: U48.1 44.77,36.43 | U48.3 46.67,36.91 46.2,36.43 44.77,36.43 | X12.P$8 45.72,34.4 44.77,35.35 44.77,36.43
N$1
  Top 0.406: U1.4 10.35,13.34 C1.1
N$2
  Top 0.406: U5.4 22.33,13.34 C6.1
N$3
  Top 0.406: U1.6 8.84,15.63 10.11,15.63 C1.2
N$4
  Top 0.406: U5.6 20.83,15.63 22.1,15.63 C6.2
N$5
  Top 0.406: U9.4 34.32,13.34 C11.1
N$6
  Top 0.406: U9.6 32.81,15.63 34.08,15.63 C11.2
N$7
  Top 0.406: U13.4 46.3,13.34 C16.1
N$8
  Top 0.406: U13.6 44.8,15.63 46.07,15.63 C16.2
N$9
  Top 0.406: U17.4 10.35,29.53 C21.1
N$10
  Top 0.406: U17.6 8.84,31.83 10.11,31.83 C21.2
N$11
  Top 0.406: U21.4 22.33,29.53 C26.1
N$12
  Top 0.406: U21.6 20.83,31.83 22.1,31.83 C26.2
N$13
  Top 0.406: U25.4 34.32,29.53 C31.1
N$14
  Top 0.406: U25.6 32.81,31.83 34.08,31.83 C31.2
N$15
  Top 0.406: U29.4 46.3,29.53 C36.1
N$16
  Top 0.406: U29.6 44.8,31.83 46.07,31.83 C36.2
N$17
  Top 0.406: U33.4 10.35,45.72 C41.1
N$18
  Top 0.406: U33.6 8.84,48.02 10.11,48.02 C41.2
N$19
  Top 0.406: U37.4 22.33,45.72 C46.1
N$20
  Top 0.406: U37.6 20.83,48.02 22.1,48.02 C46.2
N$21
  Top 0.406: U41.4 34.32,45.72 C51.1
N$22
  Top 0.406: U41.6 32.81,48.02 34.08,48.02 C51.2
N$23
  Top 0.406: U45.4 46.3,45.72 C56.1
N$24
  Top 0.406: U45.6 44.8,48.02 46.07,48.02 C56.2
SOLAR  (via drill 0.3 pad 0.6)
  Top 0.406: U1.5 7.7,14.29 6.75,13.34 U1.3 5.84,12.62 4.64,11.42 C4.+ | U3.5 5,9.21 | U2.5 2.45,9.21 3.97,9.21 | 3.97,9.21 4.92,9.21 | U4.5 7.56,9.21 5,9.21 | 5,9.21 4.92,9.21 | C2.1 4.14,10.45 C4.+ | C4.+ 4.64,9.49 4.92,9.21 | v3.97,8.65 3.97,9.21 | v3.17,3.02 3.41,2.78 X2.P$3
  Bottom 0.406: v3.17,3.02 3.17,7.86 v3.97,8.65
SOLAR1  (via drill 0.3 pad 0.6)
  Top 0.406: U5.5 19.68,14.29 18.73,13.34 U5.3 17.83,12.62 16.63,11.42 C9.+ | U7.5 16.99,9.21 | U6.5 14.43,9.21 15.95,9.21 | 15.95,9.21 16.91,9.21 | U8.5 19.55,9.21 16.99,9.21 | 16.99,9.21 16.91,9.21 | C7.1 16.13,10.45 C9.+ | C9.+ 16.63,9.49 16.91,9.21 | v15.95,8.65 15.95,9.21 | v15.16,3.02 15.4,2.78 X1.P$3
  Bottom 0.406: v15.16,3.02 15.16,7.86 v15.95,8.65
SOLAR2  (via drill 0.3 pad 0.6)
  Top 0.406: U9.5 31.67,14.29 30.72,13.34 U9.3 29.82,12.62 28.61,11.42 C14.+ | U11.5 28.97,9.21 | U10.5 26.42,9.21 27.94,9.21 | 27.94,9.21 28.89,9.21 | U12.5 31.53,9.21 28.97,9.21 | 28.97,9.21 28.89,9.21 | C12.1 28.11,10.45 C14.+ | C14.+ 28.61,9.49 28.89,9.21 | v27.94,8.65 27.94,9.21 | v27.15,3.02 27.38,2.78 X3.P$3
  Bottom 0.406: v27.15,3.02 27.15,7.86 v27.94,8.65
SOLAR3  (via drill 0.3 pad 0.6)
  Top 0.406: U13.5 43.66,14.29 42.71,13.34 U13.3 41.8,12.62 40.6,11.42 C19.+ | U15.5 40.96,9.21 | U14.5 38.4,9.21 39.93,9.21 | 39.93,9.21 40.88,9.21 | U16.5 43.52,9.21 40.96,9.21 | 40.96,9.21 40.88,9.21 | C17.1 40.1,10.45 C19.+ | C19.+ 40.6,9.49 40.88,9.21 | v39.93,8.65 39.93,9.21 | v39.13,3.02 39.37,2.78 X4.P$3
  Bottom 0.406: v39.13,3.02 39.13,7.86 v39.93,8.65
SOLAR4  (via drill 0.3 pad 0.6)
  Top 0.406: U17.5 7.7,30.48 6.75,29.53 U17.3 5.84,28.82 4.64,27.62 C24.+ | U19.5 5,25.4 | U18.5 2.45,25.4 3.97,25.4 | 3.97,25.4 4.92,25.4 | U20.5 7.56,25.4 5,25.4 | 5,25.4 4.92,25.4 | C22.1 4.14,26.64 C24.+ | C24.+ 4.64,25.68 4.92,25.4 | v3.97,24.84 3.97,25.4 | v3.17,19.21 3.41,18.97 X5.P$3
  Bottom 0.406: v3.17,19.21 3.17,24.05 v3.97,24.84
SOLAR5  (via drill 0.3 pad 0.6)
  Top 0.406: U21.5 19.68,30.48 18.73,29.53 U21.3 17.83,28.82 16.63,27.62 C29.+ | U23.5 16.99,25.4 | U22.5 14.43,25.4 15.95,25.4 | 15.95,25.4 16.91,25.4 | U24.5 19.55,25.4 16.99,25.4 | 16.99,25.4 16.91,25.4 | C27.1 16.13,26.64 C29.+ | C29.+ 16.63,25.68 16.91,25.4 | v15.95,24.84 15.95,25.4 | v15.16,19.21 15.4,18.97 X6.P$3
  Bottom 0.406: v15.16,19.21 15.16,24.05 v15.95,24.84
SOLAR6  (via drill 0.3 pad 0.6)
  Top 0.406: U25.5 31.67,30.48 30.72,29.53 U25.3 29.82,28.82 28.61,27.62 C34.+ | U27.5 28.97,25.4 | U26.5 26.42,25.4 27.94,25.4 | 27.94,25.4 28.89,25.4 | U28.5 31.53,25.4 28.97,25.4 | 28.97,25.4 28.89,25.4 | C32.1 28.11,26.64 C34.+ | C34.+ 28.61,25.68 28.89,25.4 | v27.94,24.84 27.94,25.4 | v27.15,19.21 27.38,18.97 X7.P$3
  Bottom 0.406: v27.15,19.21 27.15,24.05 v27.94,24.84
SOLAR7  (via drill 0.3 pad 0.6)
  Top 0.406: U29.5 43.66,30.48 42.71,29.53 U29.3 41.8,28.82 40.6,27.62 C39.+ | U31.5 40.96,25.4 | U30.5 38.4,25.4 39.93,25.4 | 39.93,25.4 40.88,25.4 | U32.5 43.52,25.4 40.96,25.4 | 40.96,25.4 40.88,25.4 | C37.1 40.1,26.64 C39.+ | C39.+ 40.6,25.68 40.88,25.4 | v39.93,24.84 39.93,25.4 | v39.13,19.21 39.37,18.97 X8.P$3
  Bottom 0.406: v39.13,19.21 39.13,24.05 v39.93,24.84
SOLAR8  (via drill 0.3 pad 0.6)
  Top 0.406: U33.5 7.7,46.67 6.75,45.72 U33.3 5.84,45.01 4.64,43.81 C44.+ | U35.5 5,41.59 | U34.5 2.45,41.59 3.97,41.59 | 3.97,41.59 4.92,41.59 | U36.5 7.56,41.59 5,41.59 | 5,41.59 4.92,41.59 | C42.1 4.14,42.84 C44.+ | C44.+ 4.64,41.87 4.92,41.59 | v3.97,41.04 3.97,41.59 | v3.17,35.4 3.41,35.16 X9.P$3
  Bottom 0.406: v3.17,35.4 3.17,40.24 v3.97,41.04
SOLAR9  (via drill 0.3 pad 0.6)
  Top 0.406: U37.5 19.68,46.67 18.73,45.72 U37.3 17.83,45.01 16.63,43.81 C49.+ | U39.5 16.99,41.59 | U38.5 14.43,41.59 15.95,41.59 | 15.95,41.59 16.91,41.59 | U40.5 19.55,41.59 16.99,41.59 | 16.99,41.59 16.91,41.59 | C47.1 16.13,42.84 C49.+ | C49.+ 16.63,41.87 16.91,41.59 | v15.95,41.04 15.95,41.59 | v15.16,35.4 15.4,35.16 X10.P$3
  Bottom 0.406: v15.16,35.4 15.16,40.24 v15.95,41.04
SOLAR10  (via drill 0.3 pad 0.6)
  Top 0.406: U41.5 31.67,46.67 30.72,45.72 U41.3 29.82,45.01 28.61,43.81 C54.+ | U43.5 28.97,41.59 | U42.5 26.42,41.59 27.94,41.59 | 27.94,41.59 28.89,41.59 | U44.5 31.53,41.59 28.97,41.59 | 28.97,41.59 28.89,41.59 | C52.1 28.11,42.84 C54.+ | C54.+ 28.61,41.87 28.89,41.59 | v27.94,41.04 27.94,41.59 | v27.15,35.4 27.38,35.16 X11.P$3
  Bottom 0.406: v27.15,35.4 27.15,40.24 v27.94,41.04
SOLAR11  (via drill 0.3 pad 0.6)
  Top 0.406: U45.5 43.66,46.67 42.71,45.72 U45.3 41.8,45.01 40.6,43.81 C59.+ | U47.5 40.96,41.59 | U46.5 38.4,41.59 39.93,41.59 | 39.93,41.59 40.88,41.59 | U48.5 43.52,41.59 40.96,41.59 | 40.96,41.59 40.88,41.59 | C57.1 40.1,42.84 C59.+ | C59.+ 40.6,41.87 40.88,41.59 | v39.93,41.04 39.93,41.59 | v39.13,35.4 39.37,35.16 X12.P$3
  Bottom 0.406: v39.13,35.4 39.13,40.24 v39.93,41.04
VOUT  (via drill 0.35 pad 0.6)
  Top 0.406: v0.56,15.48 0.85,15.78 1.16,15.78 C3.1 2.35,15.79 3.21,15.79 C5.1 4.41,15.79 5.29,15.79 U1.1 | v0.64,3.02 0.64,1.3 X2.P$1
  Bottom 0.406: 0.56,3.1 v0.64,3.02
  Bottom 0.508: v0.56,15.48 0.56,3.1
VOUT1  (via drill 0.35 pad 0.6)
  Top 0.406: v12.54,15.48 12.84,15.78 13.14,15.78 C8.1 14.33,15.79 15.2,15.79 C10.1 16.39,15.79 17.28,15.79 U5.1 | v12.62,3.02 12.62,1.3 X1.P$1
  Bottom 0.406: 12.54,3.1 v12.62,3.02
  Bottom 0.508: v12.54,15.48 12.54,3.1
VOUT2  (via drill 0.35 pad 0.6)
  Top 0.406: v24.53,15.48 24.82,15.78 25.13,15.78 C13.1 26.32,15.79 27.18,15.79 C15.1 28.38,15.79 29.27,15.79 U9.1 | v24.61,3.02 24.61,1.3 X3.P$1
  Bottom 0.406: 24.53,3.1 v24.61,3.02
  Bottom 0.508: v24.53,15.48 24.53,3.1
VOUT3  (via drill 0.35 pad 0.6)
  Top 0.406: v36.51,15.48 36.81,15.78 37.11,15.78 C18.1 38.3,15.79 39.17,15.79 C20.1 40.37,15.79 41.25,15.79 U13.1 | v36.59,3.02 36.59,1.3 X4.P$1
  Bottom 0.406: 36.51,3.1 v36.59,3.02
  Bottom 0.508: v36.51,15.48 36.51,3.1
VOUT4  (via drill 0.35 pad 0.6)
  Top 0.406: v0.56,31.67 0.85,31.97 1.16,31.97 C23.1 2.35,31.98 3.21,31.98 C25.1 4.41,31.98 5.29,31.98 U17.1 | v0.64,19.21 0.64,17.49 X5.P$1
  Bottom 0.406: 0.56,19.29 v0.64,19.21
  Bottom 0.508: v0.56,31.67 0.56,19.29
VOUT5  (via drill 0.35 pad 0.6)
  Top 0.406: v12.54,31.67 12.84,31.97 13.14,31.97 C28.1 14.33,31.98 15.2,31.98 C30.1 16.39,31.98 17.28,31.98 U21.1 | v12.62,19.21 12.62,17.49 X6.P$1
  Bottom 0.406: 12.54,19.29 v12.62,19.21
  Bottom 0.508: v12.54,31.67 12.54,19.29
VOUT6  (via drill 0.35 pad 0.6)
  Top 0.406: v24.53,31.67 24.82,31.97 25.13,31.97 C33.1 26.32,31.98 27.18,31.98 C35.1 28.38,31.98 29.27,31.98 U25.1 | v24.61,19.21 24.61,17.49 X7.P$1
  Bottom 0.406: 24.53,19.29 v24.61,19.21
  Bottom 0.508: v24.53,31.67 24.53,19.29
VOUT7  (via drill 0.35 pad 0.6)
  Top 0.406: v36.51,31.67 36.81,31.97 37.11,31.97 C38.1 38.3,31.98 39.17,31.98 C40.1 40.37,31.98 41.25,31.98 U29.1 | v36.59,19.21 36.59,17.49 X8.P$1
  Bottom 0.406: 36.51,19.29 v36.59,19.21
  Bottom 0.508: v36.51,31.67 36.51,19.29
VOUT8  (via drill 0.35 pad 0.6)
  Top 0.406: v0.56,47.86 0.85,48.16 1.16,48.16 C43.1 2.35,48.17 3.21,48.17 C45.1 4.41,48.17 5.29,48.17 U33.1 | v0.64,35.4 0.64,33.69 X9.P$1
  Bottom 0.406: 0.56,35.48 v0.64,35.4
  Bottom 0.508: v0.56,47.86 0.56,35.48
VOUT9  (via drill 0.35 pad 0.6)
  Top 0.406: v12.54,47.86 12.84,48.16 13.14,48.16 C48.1 14.33,48.17 15.2,48.17 C50.1 16.39,48.17 17.28,48.17 U37.1 | v12.62,35.4 12.62,33.69 X10.P$1
  Bottom 0.406: 12.54,35.48 v12.62,35.4
  Bottom 0.508: v12.54,47.86 12.54,35.48
VOUT10  (via drill 0.35 pad 0.6)
  Top 0.406: v24.53,47.86 24.82,48.16 25.13,48.16 C53.1 26.32,48.17 27.18,48.17 C55.1 28.38,48.17 29.27,48.17 U41.1 | v24.61,35.4 24.61,33.69 X11.P$1
  Bottom 0.406: 24.53,35.48 v24.61,35.4
  Bottom 0.508: v24.53,47.86 24.53,35.48
VOUT11  (via drill 0.35 pad 0.6)
  Top 0.406: v36.51,47.86 36.81,48.16 37.11,48.16 C58.1 38.3,48.17 39.17,48.17 C60.1 40.37,48.17 41.25,48.17 U45.1 | v36.59,35.4 36.59,33.69 X12.P$1
  Bottom 0.406: 36.51,35.48 v36.59,35.4
  Bottom 0.508: v36.51,47.86 36.51,35.48

## Text on the board
tPlace: . | . | . | . | + | + | + | + | . | . | . | . | . | . | . | . | . | . | . | . | . | . | . | . | + | + | + | + | . | . | . | . | . | . | . | . | . | . | . | . | . | . | . | . | + | + | + | + | . | . | . | . | . | . | . | . | . | . | . | .
tNames: V G So S1 G S2 G S3 G | V G So S1 G S2 G S3 G | V G So S1 G S2 G S3 G | V G So S1 G S2 G S3 G | V G So S1 G S2 G S3 G | V G So S1 G S2 G S3 G | V G So S1 G S2 G S3 G | V G So S1 G S2 G S3 G | V G So S1 G S2 G S3 G | V G So S1 G S2 G S3 G | V G So S1 G S2 G S3 G | V G So S1 G S2 G S3 G
_tNames: C1 | C1 | C1 | C1 | C1 | C1 | C1 | C1 | C3 | C3 | C5 | C5 | C3 | C3 | C5 | C5 | C3 | C3 | C5 | C5 | C3 | C3 | C5 | C5 | C2 | C2 | C2 | C2 | C2 | C2 | C2 | C2 | C1 | C1 | C1 | C1 | C1 | C1 | C1 | C1 | C3 | C3 | C5 | C5 | C3 | C3 | C5 | C5 | C3 | C3 | C5 | C5 | C3 | C3 | C5 | C5 | C2 | C2 | C2 | C2 | C2 | C2 | C2 | C2 | C1 | C1 | C1 | C1 | C1 | C1 | C1 | C1 | C3 | C3 | C5 | C5 | C3 | C3 | C5 | C5 | C3 | C3 | C5 | C5 | C3 | C3 | C5 | C5 | C2 | C2 | C2 | C2 | C2 | C2 | C2 | C2